# EAGLE board isoHV_2channel v0.7 (EAGLE 9.4.2)
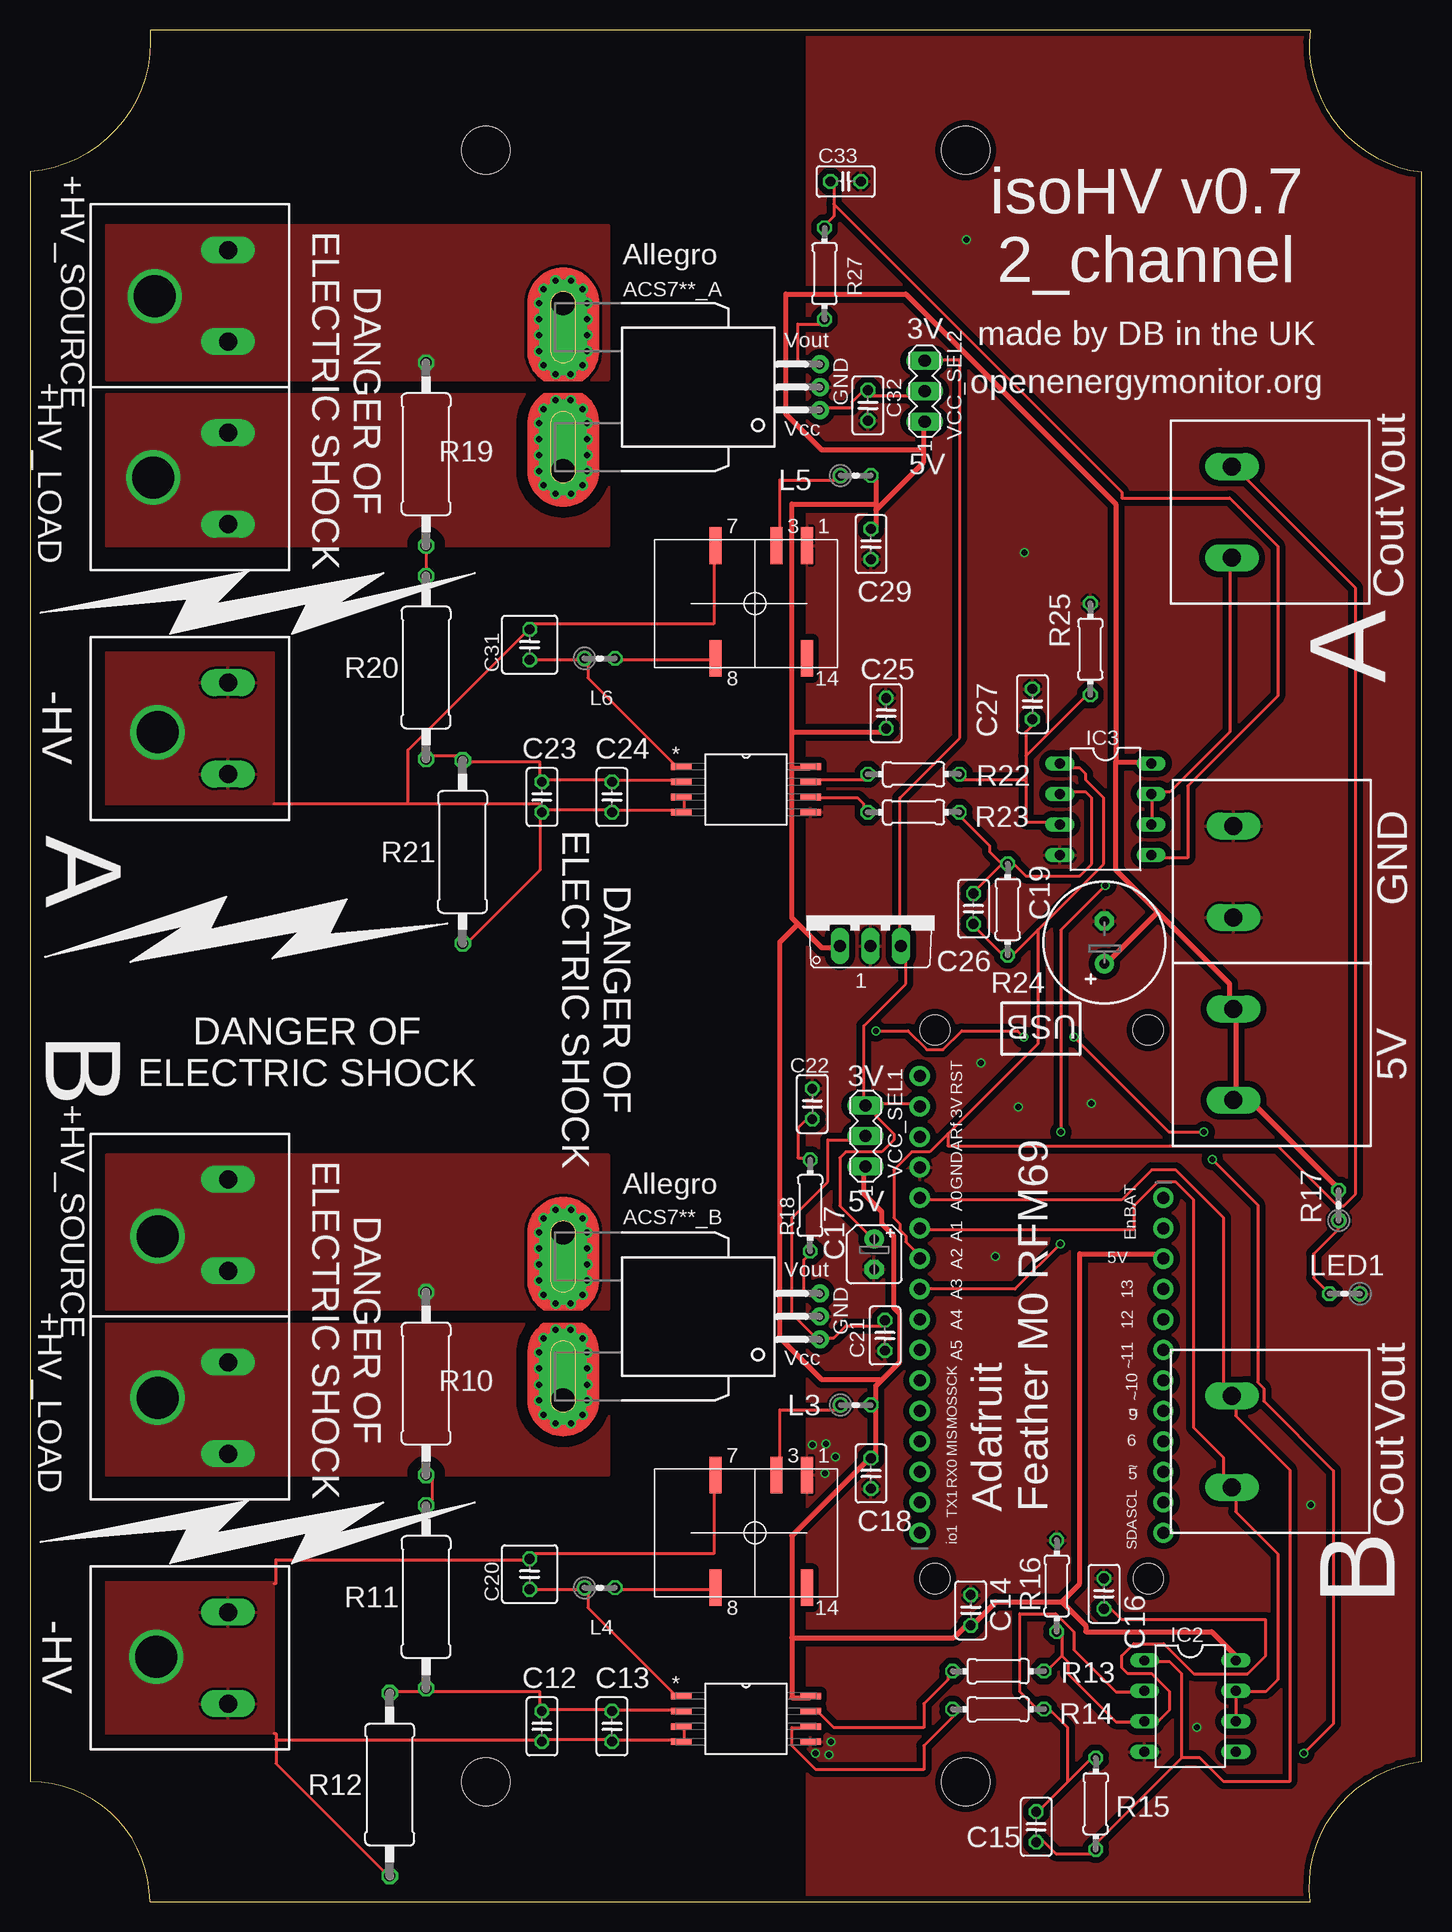
[diagram p0: board, top side]
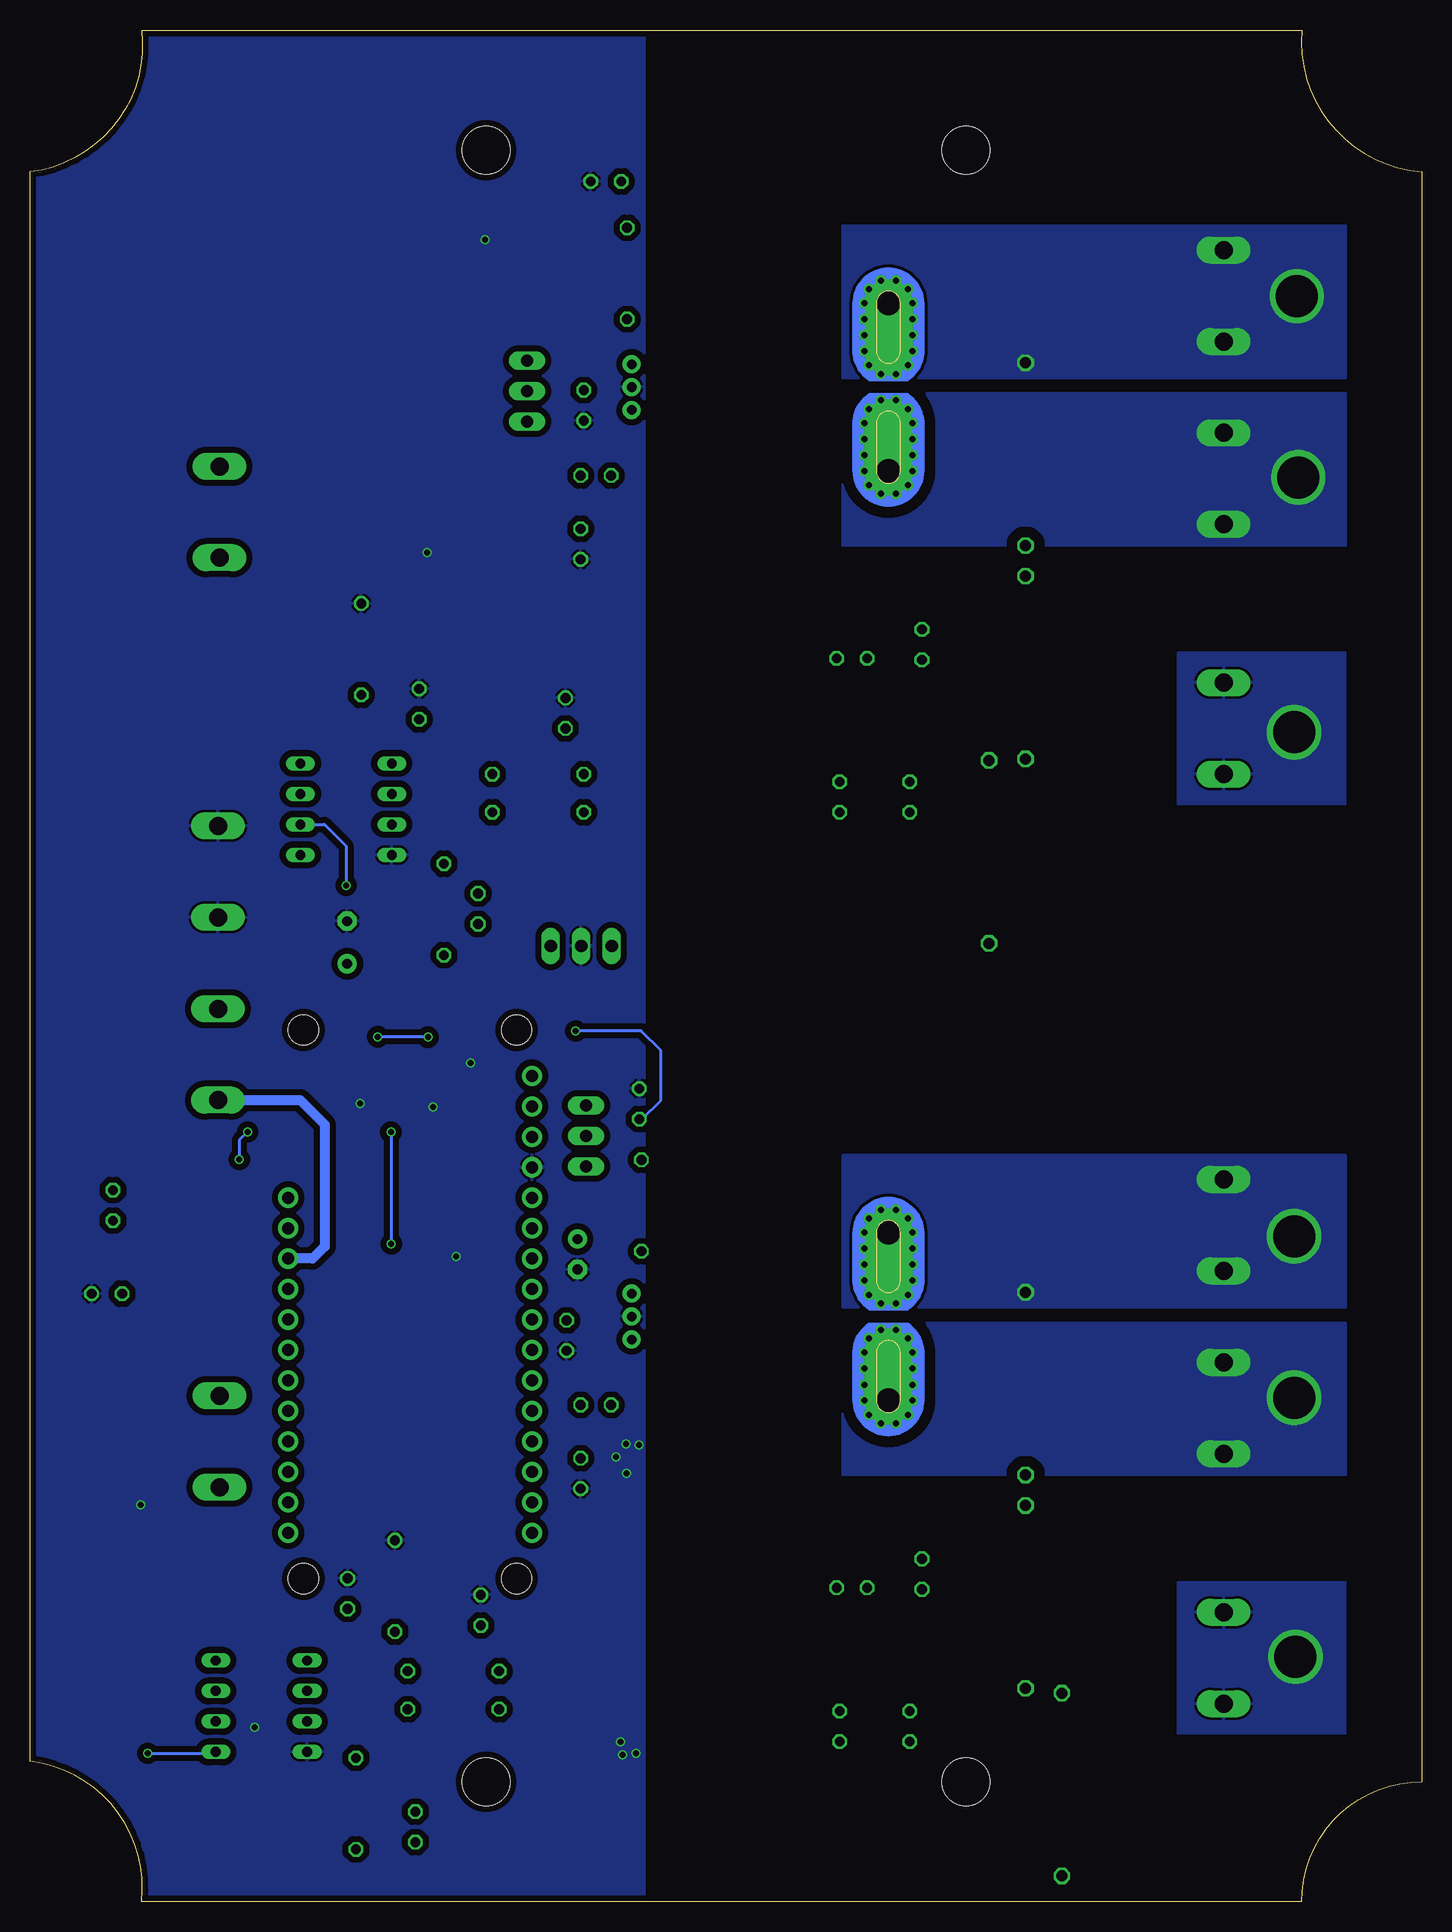
[diagram p1: board, bottom side, seen from below]

Size 116.01 x 156.01 mm. Coordinates in mm from the lower left corner, seen from the top.
Outline: 0,144.18 0,10 arc-90 10,0 106.71,0 arc-90 116.01,11.68 116.01,144.18 arc-90 106.71,156.01 10,156.01 arc-90 0,144.18
Copper layers (1*16): Top 0.035mm / dielectric 1.53mm / Bottom 0.035mm
Design rules "jlcpcb": minimum track width 6mil, minimum drill 0.45mm, track to track 6mil, track to pad 6mil, pad to pad 6mil, via to via 6mil, smd to smd 0mil, copper to edge 10mil, drill to drill 10mil, minimum pad ring 3mil, minimum via ring 3mil, stop-mask expansion 2mil, vias tented up to drill 25mil, thermal gap 8mil
Net classes: 0 default: width 0.254 mm, drill 0.254 mm, clearance 0.254 mm; 1 5v: width 0.406 mm, drill 0.254 mm, clearance 0.254 mm
Holes 2.5 mm at 93.22,26.92 75.44,26.92 75.44,72.64 93.21,72.64
Holes 4 mm at 78,146 38,146 78,10 38,10
tRestrict: area 57.6,-2.1 to 61.7,19.8; area 57.7,42.1 to 61.7,157.6
bRestrict: area 57.7,-2.5 to 61.7,157.8

## Footprints (pad centres in the part's own frame; a part is rotated, then mirrored left to right if it is on the bottom)
TO220V = drill 1.016 long: 1 -2.54,-2.54; 2 0,-2.54; 3 2.54,-2.54
CB-PFF = drill 0.8 pad 1.5: 1 -1.91,-21.4; 2 0,-21.4; 3 1.91,-21.4 | drill 2 pad 4 offset: IP+ 7,0; IP- -7,0 | drill 0.5 pad 0.9: IP+@2 8.89,0.635; IP+@3 8.89,-0.635; IP+@4 8.175,-1.625; IP+@5 7,-2; IP+@6 5.675,-2; IP+@7 4.35,-2; IP+@8 3,-2; IP+@9 1.825,-1.625; IP+@10 1.1,-0.625; IP+@11 1.1,0.625; IP+@12 1.825,1.625; IP+@13 3,2; IP+@14 4.35,2; IP+@15 5.675,2; IP+@16 7,2; IP+@17 8.175,1.625; IP-@2 -8.89,0.635; IP-@3 -8.89,-0.635; IP-@4 -8.175,-1.625; IP-@5 -7,-2; IP-@6 -5.675,-2; IP-@7 -4.325,-2; IP-@8 -3,-2; IP-@9 -1.825,-1.625; IP-@10 -1.1,-0.625; IP-@11 -1.1,0.625; IP-@12 -1.825,1.625; IP-@13 -3,2; IP-@14 -4.325,2; IP-@15 -5.675,2; IP-@16 -7,2; IP-@17 -8.175,1.625
C025-025X050 = drill 0.813 octagon: 1 -1.27,0; 2 1.27,0
B45181A = drill 0.813 pad 1.6: + -1.27,0 | drill 0.813 pad 1.6 octagon: - 1.27,0
CELEC_3.5MM_10MM = drill 0.813 pad 1.6: + -1.778,0 | drill 0.813 pad 1.6 octagon: - 1.778,0
C025-050X050 = drill 0.813 octagon: 1 -1.27,0; 2 1.27,0
DIL08 = drill 0.813 long: 1 -3.81,-3.81; 2 -1.27,-3.81; 3 1.27,-3.81; 4 3.81,-3.81; 5 3.81,3.81; 6 1.27,3.81; 7 -1.27,3.81; 8 -3.81,3.81
1X16_ROUND = drill 1 pad 1.676: 1 -19.05,0; 2 -16.51,0; 3 -13.97,0; 4 -11.43,0; 5 -8.89,0; 6 -6.35,0; 7 -3.81,0; 8 -1.27,0; 9 1.27,0; 10 3.81,0; 11 6.35,0; 12 8.89,0; 13 11.43,0; 14 13.97,0; 15 16.51,0; 16 19.05,0
1X12_ROUND = drill 1 pad 1.676: 1 -13.97,0; 2 -11.43,0; 3 -8.89,0; 4 -6.35,0; 5 -3.81,0; 6 -1.27,0; 7 1.27,0; 8 3.81,0; 9 6.35,0; 10 8.89,0; 11 11.43,0; 12 13.97,0
0204V = drill 0.813 octagon: 1 -1.27,0; 2 1.27,0
0411/15 = drill 0.914 octagon: 1 -7.62,0; 2 7.62,0
0204/7 = drill 0.813 octagon: 1 -3.81,0; 2 3.81,0
SOIC127P1150X330-8N = smd 1.702 x 0.559: 1 -5.385,1.905; 2 -5.385,0.635; 3 -5.385,-0.635; 4 -5.385,-1.905; 5 5.385,-1.905; 6 5.385,-0.635; 7 5.385,0.635; 8 5.385,1.905
7.62MM = drill 1.5 long: P$1 0,-3.81; P$2 0,3.81
NXF1 = smd 0.991 x 3.048: P$1 0,0; P$3 2.54,0; P$7 7.62,0; P$8 7.62,9.398; P$14 0,9.398
MA03-1 = drill 1.016 long: 1 -2.54,0; 2 0,0; 3 2.54,0

## Placement (x,y rotation side)
1  7805TV  [TO220V]  70.06,82.2 0 top
ACS7**_A  ACS758KCB-150B-PFF-T  [CB-PFF]  44.45,126.24 90 top
ACS7**_B  ACS758KCB-150B-PFF-T  [CB-PFF]  44.45,48.77 90 top
C12  100pF  [C025-025X050]  42.67,14.61 270 top
C13  100nF  [C025-025X050]  48.51,14.61 270 top
C14  100nF  [C025-025X050]  78.43,24.29 90 top
C15  100nF  [C025-025X050]  83.88,6.23 270 top
C16  100nF  [C025-025X050]  89.53,25.67 90 top
C17  10uF  [B45181A]  70.37,53.96 270 top
C18  GRM21BR71A475KA73  [C025-025X050]  70.1,35.69 270 top
C19  [CELEC_3.5MM_10MM]  89.56,79.95 90 top
C20  GRM21BR71A475KA73  [C025-050X050]  41.66,27.3 90 top
C21  0.1uF  [C025-025X050]  71.27,47.19 270 top
C22  0.1uF  [C025-025X050]  65.21,66.5 90 top
C23  100pF  [C025-025X050]  42.67,92.08 270 top
C24  100nF  [C025-025X050]  48.51,92.08 270 top
C25  100nF  [C025-025X050]  71.37,99.06 90 top
C26  100nF  [C025-025X050]  78.65,82.76 270 top
C27  100nF  [C025-025X050]  83.57,99.82 90 top
C29  GRM21BR71A475KA73  [C025-025X050]  70.1,113.16 270 top
C31  GRM21BR71A475KA73  [C025-050X050]  41.66,104.78 90 top
C32  0.1uF  [C025-025X050]  69.85,124.71 270 top
C33  0.1uF  [C025-025X050]  67.99,143.39 0 top
IC2  AD712N  [DIL08]  96.71,16.29 270 top
IC3  AD712N  [DIL08]  89.66,91.06 270 top
JP1  [1X16_ROUND]  74.17,49.78 90 top
JP3  [1X12_ROUND]  94.49,44.7 270 top
L3  11R472C  [0204V]  68.83,41.4 0 top
L4  11R472C  [0204V]  47.5,26.16 0 top
L5  11R472C  [0204V]  68.83,118.87 0 top
L6  11R472C  [0204V]  47.5,103.63 0 top
LED1  [0204V]  109.6,50.67 180 top
R10  [0411/15]  33.02,43.18 90 top
R11  [0411/15]  33.02,25.4 90 top
R12  [0411/15]  29.99,9.76 90 top
R13  10k  [0204/7]  80.71,19.21 0 top
R14  10k  [0204/7]  80.71,16.04 0 top
R15  10k  [0204/7]  88.84,8.16 270 top
R16  10k  [0204/7]  85.59,26.31 270 top
R17  200R  [0204V]  109.09,58.04 90 top
R18  1k  [0204/7]  65.04,58.02 90 top
R19  [0411/15]  33.02,120.65 90 top
R20  [0411/15]  33.02,102.87 90 top
R21  [0411/15]  36.07,87.5 90 top
R22  10k  [0204/7]  73.66,93.98 0 top
R23  10k  [0204/7]  73.66,90.81 0 top
R24  10k  [0204/7]  81.5,82.7 270 top
R25  10k  [0204/7]  88.39,104.39 270 top
R27  1k  [0204/7]  66.23,135.71 90 top
U2  ACPL-C87x  [SOIC127P1150X330-8N]  59.69,15.24 0 top
U3  ACPL-C87x  [SOIC127P1150X330-8N]  59.69,92.71 0 top
U$8  7.62MM_TERMINAL_BLOCK  [7.62MM]  16.51,56.39 0 top
U$9  7.62MM_TERMINAL_BLOCK  [7.62MM]  16.51,20.32 0 top
U$10  7.62MM_TERMINAL_BLOCK  [7.62MM]  100.33,70.61 180 top
U$14  7.62MM_TERMINAL_BLOCK  [7.62MM]  100.33,85.85 180 top
U$15  7.62MM_TERMINAL_BLOCK  [7.62MM]  100.2,38.35 180 top
U$16  7.62MM_TERMINAL_BLOCK  [7.62MM]  16.51,41.15 0 top
U$17  NXF1  [NXF1]  64.77,35.56 180 top
U$21  7.62MM_TERMINAL_BLOCK  [7.62MM]  16.51,133.86 0 top
U$22  7.62MM_TERMINAL_BLOCK  [7.62MM]  16.51,97.79 0 top
U$25  7.62MM_TERMINAL_BLOCK  [7.62MM]  100.2,115.82 180 top
U$26  7.62MM_TERMINAL_BLOCK  [7.62MM]  16.51,118.62 0 top
U$27  NXF1  [NXF1]  64.77,113.03 180 top
VCC_SEL1  [MA03-1]  69.65,63.82 90 top
VCC_SEL2  [MA03-1]  74.58,125.92 90 top

## Library data of the parts
1 = linear
ACS7**_A ACS7**_B = allegro; MPN: ACS7**; OC_FARNELL: 1718995; OC_NEWARK: 04R7129
C12-C18 C20-C27 C29 C31-C33 = rcl; SPICEPREFIX: C
C19 JP1 JP3 = microbuilder
IC2 IC3 = analog-devices; MF: ALTERA CORPORATION; MPN: AD712JNZ; OC_FARNELL: 9604898; OC_NEWARK: 59K4554
L3-L6 = rcl; SPICEPREFIX: L
LED1 R12-R18 R21-R25 R27 = rcl; SPICEPREFIX: R
R10 R11 R19 R20 = rcl; MPN: HVR37; SPICEPREFIX: R
U2 U3 = Avago_By_element14_Batch_1; DESCRIPTION: Precision Miniature Isolation Amplifiers; MPN: ACPL-C79B-000E; OC_FARNELL: 1854253; OC_NEWARK: 74R5803; PACKAGE: SOIC-8; SUPPLIER: AVAGO TECHNOLOGIES
U$8-U$10 U$14-U$16 U$21 U$22 U$25 U$26 = 7.62mm terminal block
U$17 U$27 = NXF1
VCC_SEL1 VCC_SEL2 = con-lstb; OC_FARNELL: unknown; OC_NEWARK: unknown

## Nets
!RESET: JP1.16
+3V3: 1.3 C17.+ JP1.15 VCC_SEL1.3 VCC_SEL2.3
+5V_INPUT [5v]: 1.1 C14.1 C18.1 C19.+ C25.1 C29.1 IC2.8 IC3.8 JP3.3 L3.2 L5.2 R17.2 U2.8 U3.8 U$10.P$1 U$10.P$2 VCC_SEL1.1 VCC_SEL2.1
+DC-DC_OUT: C20.1 L4.1 U2.1
+DC-DC_OUT_A: C31.1 L6.1 U3.1
A0: C15.2 IC2.1 JP1.12 R15.2 U$15.P$1
A1: IC2.6 IC2.7 JP1.11 U$15.P$2
A2: C26.2 IC3.1 JP1.10 R24.2 U$25.P$1
A3: IC3.6 IC3.7 JP1.9 U$25.P$2
A4: JP1.8
A5: JP1.7
AREF: JP1.14
D0: JP1.3
D1: JP1.2
D5: JP3.10
D6: JP3.9
D9: JP3.8
D10: JP3.7
D11: JP3.6
D12: JP3.5
D13: JP3.4
DIO1: JP1.1
EN: JP3.2
GND: 1.2 ACS7**_A.2 ACS7**_B.2 C14.2 C16.2 C17.- C18.2 C19.- C21.2 C22.2 C25.2 C27.2 C29.2 C32.2 C33.2 IC2.4 IC3.4 JP1.13 LED1.1 R16.1 R25.1 U2.5 U3.5 U$14.P$1 U$14.P$2 U$17.P$1 U$27.P$1
GND_HV: C12.2 C13.2 C20.2 R12.1 U2.3 U2.4 U$9.P$1 U$9.P$2 U$17.P$7
GND_HV_A: C23.2 C24.2 C31.2 R21.1 U3.3 U3.4 U$22.P$1 U$22.P$2 U$27.P$7
HV+_LOAD: ACS7**_B.IP- ACS7**_B.IP-@2 ACS7**_B.IP-@3 ACS7**_B.IP-@4 ACS7**_B.IP-@5 ACS7**_B.IP-@6 ACS7**_B.IP-@7 ACS7**_B.IP-@8 ACS7**_B.IP-@9 ACS7**_B.IP-@10 ACS7**_B.IP-@11 ACS7**_B.IP-@12 ACS7**_B.IP-@13 ACS7**_B.IP-@14 ACS7**_B.IP-@15 ACS7**_B.IP-@16 ACS7**_B.IP-@17 U$16.P$1 U$16.P$2
HV+_LOAD_A: ACS7**_A.IP- ACS7**_A.IP-@2 ACS7**_A.IP-@3 ACS7**_A.IP-@4 ACS7**_A.IP-@5 ACS7**_A.IP-@6 ACS7**_A.IP-@7 ACS7**_A.IP-@8 ACS7**_A.IP-@9 ACS7**_A.IP-@10 ACS7**_A.IP-@11 ACS7**_A.IP-@12 ACS7**_A.IP-@13 ACS7**_A.IP-@14 ACS7**_A.IP-@15 ACS7**_A.IP-@16 ACS7**_A.IP-@17 U$26.P$1 U$26.P$2
HV+_SOURCE: ACS7**_B.IP+ ACS7**_B.IP+@2 ACS7**_B.IP+@3 ACS7**_B.IP+@4 ACS7**_B.IP+@5 ACS7**_B.IP+@6 ACS7**_B.IP+@7 ACS7**_B.IP+@8 ACS7**_B.IP+@9 ACS7**_B.IP+@10 ACS7**_B.IP+@11 ACS7**_B.IP+@12 ACS7**_B.IP+@13 ACS7**_B.IP+@14 ACS7**_B.IP+@15 ACS7**_B.IP+@16 ACS7**_B.IP+@17 R10.2 U$8.P$1 U$8.P$2
HV+_SOURCE_A: ACS7**_A.IP+ ACS7**_A.IP+@2 ACS7**_A.IP+@3 ACS7**_A.IP+@4 ACS7**_A.IP+@5 ACS7**_A.IP+@6 ACS7**_A.IP+@7 ACS7**_A.IP+@8 ACS7**_A.IP+@9 ACS7**_A.IP+@10 ACS7**_A.IP+@11 ACS7**_A.IP+@12 ACS7**_A.IP+@13 ACS7**_A.IP+@14 ACS7**_A.IP+@15 ACS7**_A.IP+@16 ACS7**_A.IP+@17 R19.2 U$21.P$1 U$21.P$2
MISO: JP1.4
MOSI: JP1.5
N$10: R10.1 R11.2
N$11: C16.1 IC2.3 R13.2 R16.2
N$12: C15.1 IC2.2 R14.2 R15.1
N$13: ACS7**_B.1 C21.1 VCC_SEL1.2
N$14: C22.1 IC2.5 R18.2
N$15: LED1.2 R17.1
N$16: L3.1 U$17.P$3
N$17: L4.2 U$17.P$8
N$18: ACS7**_B.3 R18.1
N$19_A: R19.1 R20.2
N$20: C27.1 IC3.3 R22.2 R25.2
N$21: C26.1 IC3.2 R23.2 R24.1
N$22: ACS7**_A.1 C32.1 VCC_SEL2.2
N$23: C33.1 IC3.5 R27.2
N$25: L5.1 U$27.P$3
N$26_A: L6.2 U$27.P$8
N$27: ACS7**_A.3 R27.1
SCK: JP1.6
SCL: JP3.11
SDA: JP3.12
SIGNAL_IN: C12.1 C13.1 R11.1 R12.2 U2.2
SIGNAL_IN_A: C23.1 C24.1 R20.1 R21.2 U3.2
SIGNAL_OUT+: R13.1 U2.7
SIGNAL_OUT+_A: R22.1 U3.7
SIGNAL_OUT-: R14.1 U2.6
SIGNAL_OUT-_A: R23.1 U3.6
VBAT: JP3.1

## Tracks (layer width: path | path; a pad name or v marks a point on that pad's centre or on a via)
+3V3
  Top 0.254: 70.5,66.5 74,66.5 JP1.15 | 70.5,66.5 70,66.5 VCC_SEL1.3 | VCC_SEL1.3 69.5,66.5 69.5,73 73,76.5 73,79.5 1.3 72.5,80 72.5,92 77.5,97 77.5,128.5 75,128.5 VCC_SEL2.3 | 70.5,66.5 70.5,65.5 72,64 72,63.5 71,62.5 68,62.5 67.5,62 67.5,58 70,55.5 C17.+ | 70.5,66.5 VCC_SEL1.3
+5V_INPUT
  Top 0.406: R17.2 109,59.5 102,66.5 100.5,66.5 U$10.P$2 100.5,67 100.5,74 U$10.P$1 100,74.5 100,76.5 94,82.5 | 90.5,95 93,95 IC3.8 | 90.5,95 90.5,86 94,82.5 | 94,82.5 90,78.5 C19.+ | 70.5,116.5 70.5,118.5 L5.2 | 70.5,116.5 70.5,116 | 70.5,116 70.5,114.5 C29.1 | 74.5,121 74.5,120 70.5,116 | 74.5,121 74.5,123 VCC_SEL2.1 | 63.5,94.5 65,94.5 U3.8 | 63.5,94.5 63.5,82 64,81.5 | 64,81.5 66,79.5 67.5,79.5 1.1 | 63.5,97.5 71,97.5 C25.1 | 63.5,94.5 63.5,97.5 | 70.5,116.5 63.5,116.5 63.5,97.5 | 63.5,22 63.5,30.5 70,37 C18.1 70.5,37 70.5,41 L3.2 70.5,41.5 70.5,43 71,43.5 | 63.5,22 63.5,17 65,17 U2.8 | 63.5,22 77,22 78,23 C14.1 78.5,23 80.5,25 86,25 | 86,25 88,23 88,22.5 98.5,22.5 100.5,20.5 IC2.8 | 71,43.5 72.5,45 72.5,49 72,49.5 72,55.5 71,56.5 71,57.5 69.5,59 69.5,61 VCC_SEL1.1 | 86,25 87.5,26.5 87.5,54 94,54 JP3.3 | 64,81.5 62.5,80 62.5,47 66,43.5 71,43.5 | 90.5,95 90.5,116.5 73,134 63,134 63,124 66,121 74.5,121
  Bottom 0.813: U$10.P$2 93.47,66.8 91.44,64.77 91.44,54.61 92.46,53.59 JP3.3
+DC-DC_OUT
  Top 0.254: U2.1 54,17 46.5,24.5 46.5,26 L4.1 46,26 42,26 C20.1
+DC-DC_OUT_A
  Top 0.254: U3.1 54,94.5 46.5,102 46.5,103.5 L6.1 46,103.5 42,103.5 C31.1
A0
  Top 0.254: C15.2 84,5 84.5,5 85.5,4 88.5,4 R15.2 89,4.5 89,5 96,12 | 96,12 96,19 95,20 93,20 IC2.1 | JP1.12 74.5,58.5 91,58.5 93.5,61 95.5,61 99.5,57 99.5,43 100,42.5 U$15.P$1 100.5,42 100.5,40.5 105,36 105,10 99.5,10 97.5,12 96,12
A1
  Top 0.254: IC2.6 100.5,15.5 100.5,17.5 IC2.7 101,17.5 103,17.5 104,18.5 104,29 100.5,32.5 100.5,34.5 U$15.P$2 100,35 99.5,35.5 99.5,37 97,39.5 97,58.5 95.5,60 94,60 92,58 92,56 74.5,56 JP1.11
A2
  Top 0.254: C26.2 79,81 81.5,78.5 R24.2 82,79 84,81 | 84,81 89.5,86.5 89.5,92 88,93.5 88,94 87.5,94.5 86,94.5 IC3.1 | 76.5,64 84,71.5 84,81 | 76.5,64 75,62.5 73.5,62.5 72,61 72,57 72.5,56.5 72.5,56 73,55.5 73,55 74,54 JP1.10 | 76.5,64 76.5,63 104,63 109,58 109.5,58 110.5,59 110.5,109.5 100.5,119.5 U$25.P$1
A3  (via drill 0.5)
  Top 0.254: IC3.6 93.5,90 93.5,92 IC3.7 93.5,92.5 95,92.5 100,97.5 100,112 U$25.P$2 | v89.66,84.72 85.92,80.98 v85.92,64.14 | v85.89,54.83 82.11,51.05 JP1.9
  Bottom 0.254: IC3.6 91.45,89.79 89.66,87.99 v89.66,84.72 | v85.92,64.14 85.92,54.87 v85.89,54.83
GND  (via drill 0.5)
  other vias: 65.22,38.07 66.34,38.17 66.27,35.69 67.14,37.08 66.76,13.31 66.62,12.26 65.5,12.36 82.41,66.23 79.28,69.92 88.5,66.51 80.48,53.78 106.79,33.06 97.28,14.52 82.9,112.45 78.08,138.52
  pour Bottom (isolate 0.508): 64.77,159.11 118.11,159.11 118.11,-1.27 64.77,-1.27
  pour Top (isolate 0.508): 64.77,156.21 64.77,-6.35 119.38,-6.35 119.38,156.21
GND_HV  (via drill 3.5)
  Top 0.254: U$17.P$7 57,35.5 57,29 42,29 C20.2 41.5,28.5 20.5,28.5 20.5,26.5 20.32,26.5 | U2.3 54.5,14.5 54.5,13.5 U2.4 54,13.5 49,13.5 C13.2 48.5,13.5 43,13.5 C12.2 42.5,13.5 20.5,13.5 | 20.5,13.5 20.5,14 20.32,14 | 20.5,13.5 20.5,11.5 29.5,2.5 R12.1
  other vias: 10.51,20.41
  pour Top: 6.35,26.67 20.32,26.67 20.32,13.97 6.35,13.97
  pour Bottom: 20.32,26.67 6.35,26.67 6.35,13.97 20.32,13.97
GND_HV_A  (via drill 3.5)
  Top 0.254: U$27.P$7 57,113 57,106.5 42,106.5 C31.2 41.5,106 31.5,96 31.5,91.5 | U3.3 54.5,92 54.5,91 U3.4 54,91 49,91 C24.2 48.5,91 43,91 C23.2 | R21.1 36.5,80 42.5,86 42.5,90.5 C23.2 | 31.5,91.5 42.5,91.5 42.5,91 C23.2 | 31.5,91.5 20.32,91.5
  other vias: 10.63,97.47
  pour Top: 6.35,104.14 20.32,104.14 20.32,91.44 6.35,91.44
  pour Bottom: 20.32,104.14 6.35,104.14 6.35,91.44 20.32,91.44
HV+_LOAD  (via drill 3.5)
  other vias: 10.63,42.01
  pour Bottom (isolate 0.889, no thermals): 48.26,48.26 6.35,48.26 6.35,35.56 48.26,35.56
  pour Top (isolate 0.889, no thermals): 48.26,48.13 6.35,48.13 6.35,35.56 48.26,35.56
HV+_LOAD_A  (via drill 3.5)
  other vias: 10.27,118.71
  pour Top (isolate 0.889, no thermals): 48.26,125.6 6.35,125.6 6.35,113.03 48.26,113.03
  pour Bottom (isolate 0.889, no thermals): 48.26,125.73 6.35,125.73 6.35,113.03 48.26,113.03
HV+_SOURCE  (via drill 3.5)
  other vias: 10.63,55.46
  pour Bottom (no thermals): 6.35,49.53 48.26,49.53 48.26,62.23 6.35,62.23
  pour Top (no thermals): 6.35,49.4 48.26,49.4 48.26,62.23 6.35,62.23
HV+_SOURCE_A  (via drill 3.5)
  other vias: 10.39,133.82
  pour Top (no thermals): 6.35,126.87 48.26,126.87 48.26,139.7 6.35,139.7
  pour Bottom (no thermals): 6.35,127 48.26,127 48.26,139.7 6.35,139.7
N$10
  Top 0.254: R11.2 33.5,33.5 33.5,35.5 R10.1
N$11
  Top 0.254: 86,20.5 85,19.5 R13.2 | 86,20.5 86,22.5 R16.2 | 86,20.5 86.5,20 86.5,19 90.5,15 92.5,15 IC2.3 93,15 94,15 95,16 95,17.5 93.5,19 91.5,19 91,19.5 91,20.5 92,21.5 94.5,21.5 97,19 101.5,19 103,20.5 103,23.5 91,23.5 90,24.5 C16.1
N$12
  Top 0.254: 86.5,10 88.5,12 R15.1 | 86.5,10 84,7.5 C15.1 | 86.5,10 86.5,14.5 85,16 R14.2 84.5,16 84,16 82.5,17.5 82.5,24 85.5,24 87,22.5 87,21 90.5,17.5 92.5,17.5 IC2.2
N$13
  Top 0.254: C21.1 71,48 68,48 67,47 66,47 ACS7**_B.1 65.5,47 63.5,49 63.5,57 66.5,60 66.5,63.5 69.5,63.5 VCC_SEL1.2
N$14  (via drill 0.5)
  Top 0.254: R18.2 65,62 64,62 64,64.5 65,65.5 C22.1 | v70.52,72.58 73.19,72.58 74.76,71.01 76.11,71.01 77.68,72.58 82.31,72.58 v82.84,72.06 | v82.84,72.06 | v87.01,72.09 94.94,64.17 v97.87,64.17 | v98.56,61.86 102.34,58.08 102.34,43.28 102.83,42.79 102.83,41.73 108.66,35.91 108.66,14.83 v106.19,12.37
  Bottom 0.254: C22.1 65,65.23 63.43,66.8 63.43,70.95 65.06,72.58 v70.52,72.58 | v82.84,72.06 86.98,72.06 v87.01,72.09 | v97.87,64.17 98.56,63.48 v98.56,61.86 | v106.19,12.37 100.64,12.37 IC2.5
N$15
  Top 0.254: LED1.2 108,51 107,52 107,54 109,56 109,56.5 R17.1
N$16
  Top 0.254: L3.1 67.5,41 62.5,41 62.5,36 U$17.P$3
N$17
  Top 0.254: L4.2 49,26 57,26 U$17.P$8
N$18
  Top 0.254: R18.1 65,54 64.5,53.5 64.5,51 65,50.5 65.5,50.5 ACS7**_B.3
N$19_A
  Top 0.254: R20.2 33,110.5 33,113 R19.1
N$20
  Top 0.254: 83,95.5 83,97.5 83.5,98 83.5,98.5 C27.1 | 83,95.5 83,93.5 | 83,93.5 83,90 85.5,90 IC3.3 | 83,93.5 77.5,93.5 R22.2 | 83,95.5 88,100.5 R25.2
N$21
  Top 0.254: 81,86.5 81.5,87 R24.1 | 81,86.5 79,84.5 C26.1 | 81,86.5 80,87.5 80,88 77.5,90.5 R23.2 | 81,86.5 R24.1 | IC3.2 86,92.5 88,92.5 88.5,92 88.5,86.5 87.5,85.5 83,85.5 82,86.5 R24.1
N$22
  Top 0.254: VCC_SEL2.2 74.5,125.5 70,125.5 C32.1 69.5,126 68.5,125 68.5,124.5 66,124.5 ACS7**_A.1
N$23
  Top 0.254: 67,141.5 67,143 C33.1 | 67,141.5 67,140.5 66.5,140 R27.2 | 67,141.5 91,117.5 91,117 100,117 104,113 104,100.5 96.5,93 96.5,87 93.5,87 IC3.5
N$25
  Top 0.254: L5.1 67.5,118.5 62.5,118.5 62.5,113.5 U$27.P$3
N$26_A
  Top 0.254: L6.2 49,103.5 57,103.5 U$27.P$8
N$27
  Top 0.254: R27.1 66,131.5 64,131.5 64,128.5 64.5,128 65.5,128 ACS7**_A.3
SIGNAL_IN
  Top 0.254: R12.2 30,17.5 33,17.5 R11.1 33.5,17.5 42.5,17.5 42.5,16 C12.1 43,16 48.5,16 C13.1 49,16 54,16 U2.2
SIGNAL_IN_A
  Top 0.254: R20.1 33.5,95.5 36,95.5 R21.2 36.5,95 42.5,95 42.5,93.5 C23.1 43,93.5 48.5,93.5 C24.1 49,93.5 54,93.5 U3.2
SIGNAL_OUT+
  Top 0.254: U2.7 65.5,16 67,14.5 74.5,14.5 74.5,16.5 76.5,18.5 76.5,19 R13.1
SIGNAL_OUT+_A
  Top 0.254: U3.7 65.5,93.5 69.5,93.5 R22.1
SIGNAL_OUT-
  Top 0.254: U2.6 65,14.5 63.5,14.5 63.5,13 65.5,11 74.5,11 74.5,13 77,15.5 77,16 R14.1
SIGNAL_OUT-_A
  Top 0.254: U3.6 65.5,92 69,92 69.5,91.5 69.5,91 R23.1

## Text on the board
tPlace: USB | RST | 3V | ARf | GND | A0 | BAT | A1 | En | A2 | 5V | A3 | 13 | A4 | 12 | A5 | 11 | ~ | SCK | 10 | ~ | MOS | 9 | ~ | MIS | 6 | RX0 | 5 | ~ | TX1 | Adafruit / Feather M0 RFM69 | SCL | io1 | SDA
tNames: +HV_SOURCE | isoHV v0.7 / 2_channel | Allegro | 3V | made by DB in the UK | Vout | +HV_LOAD | openenergymonitor.org | DANGER OF / ELECTRIC SHOCK | GND | Vcc | 5V | Vout | Cout | A | -HV | A | GND | DANGER OF / ELECTRIC SHOCK | B | DANGER OF / ELECTRIC SHOCK | 3V | 5V | +HV_SOURCE | Allegro | 5V | Vout | +HV_LOAD | DANGER OF / ELECTRIC SHOCK | GND | Vcc | Vout | Cout | B | -HV